# Altium PCB TPS5450.PcbDoc
Units mil, origin at the board's own origin, x right, y up, seen from the top; angles counter-clockwise.
Board outline 740.03 x 410.03 mil, 2 copper layers (Top Layer, Bottom Layer); 8 components, 6 nets, 19 pads, 0 vias.
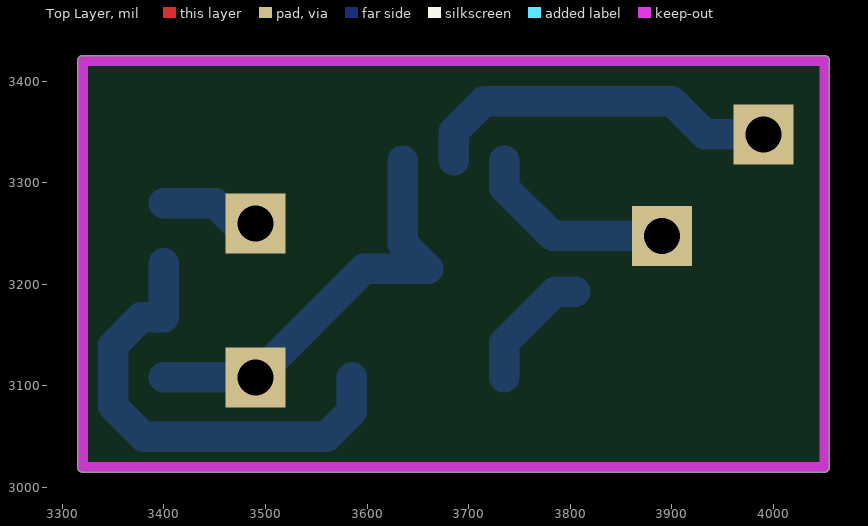
[diagram p0: Top Layer view]
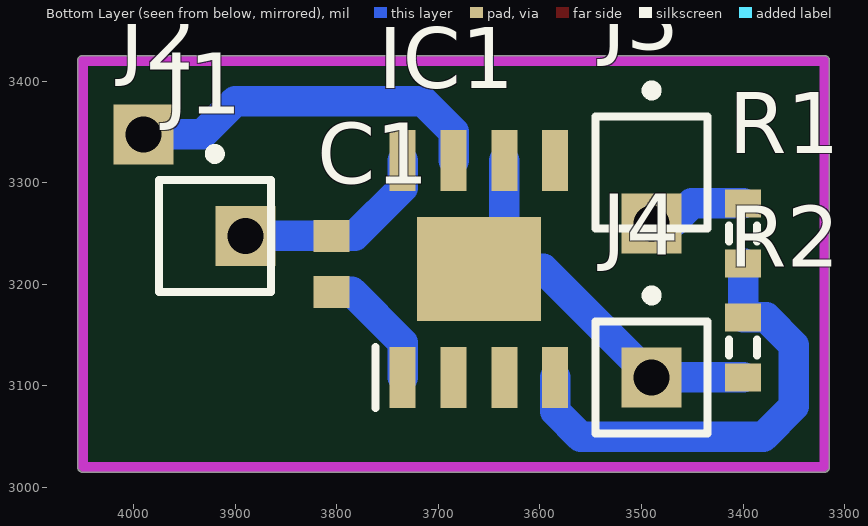
[diagram p1: Bottom Layer view, seen from below]

## Layer stack, top to bottom
Top Solder: solder mask 0.4, Solder Resist, Dk 3.5
Top Layer: signal copper 1.4
Dielectric 1: dielectric 12.6, FR-4, Dk 4.8
Bottom Layer: signal copper 1.4
Bottom Solder: solder mask 0.4, Solder Resist, Dk 3.5

## Board outline
4055.01,3020 cw(c4050,3020) 4050,3014.99 3320,3014.99 cw(c3320,3020) 3314.99,3020 3314.99,3420 cw(c3320,3420) 3320,3425.01 4050,3425.01 cw(c4050,3420) 4055.01,3420

## Design rules (kind name [scope] priority, off if disabled: settings)
Clearance [All] p1: gap=10 ignorepadtopadclearanceinfootprint=FALSE except(0: Arc-Hole Track-Hole SMDPad-Hole THPad-Hole Via-Hole Fill-Hole Poly-Hole Region-Hole Text-Hole)
PolygonConnect [All] p1: connectstyle=Relief reliefconductorwidth=10 reliefentries=4 polygonreliefangle="90 Angle" airgapwidth=10
RoomDefinition TPS5450 [InComponentClass('TPS5450')] p1: confinementstyle=ConfineIn formatcopy=TRUE lockcomponents=FALSE outline 4050,3020 3320,3020 3320,3420 4050,3420
RoutingLayers [All] p1: top layer_v5=FALSE bottom layer_v5=TRUE
RoutingVias [All] p1: holewidth=28 width=50 viastyle="Through Hole" minholewidth=28 minwidth=50 maxholewidth=28 maxwidth=50
SolderMaskExpansion [All] p1: expansion=4
Width [All] p1: maxlimit=50 minlimit=10 preferedwidth=30 bottomlayer_prefwidth=10 minimp=50.000000 maximp=50.000000 favimp=50.000000
29 further rules are at their usual default settings.

## Components (designator, comment, footprint, x,y, rotation, side; value= is the part's Value field where it differs from the comment)
C1 "Cap Semi" 1608[0603] 3805,3220 r90 bottom value=10nF
IC1 "TPS5450QDDARQ1" SOIC127P600X170-9N 3660,3215 r90 bottom
J1 "Socket" PIN1#1 3920,3247.56 r180 bottom
J2 "Socket" PIN1#2 3920,3247.56 r180 bottom
J3 "Socket" PIN1#3 3490,3310 r180 bottom
J4 "Socket" PIN1#4 3490,3108.23 r180 bottom
R1 "Res3" J1-0603 3400,3250 r90 bottom value=10K
R2 "Res3" J1-0603 3400,3137.76 r270 bottom value=3.24K

## Footprints (in the part's own frame and the unit in brackets; to place one, negate y for a bottom-side part, rotate by r counter-clockwise, add the part's x,y. Pads: shape width x height; smd on the part's side, far side on the other; paste and mask are expansions set on the pad)
1608[0603] [mm] "Chip Capacitor, Body 1.6x0.8mm, IPC High Density"
  rect 0.8x0.9 smd: 1(-0.7,0) 2(0.7,0)
  body extent -0.87,-0.48 0.87,0.48, height 1.3
J1-0603 [mm] "Chip Resistor, Body 1.6x0.8mm, IPC High Density"
  rect 0.7x0.9 smd: 1(-0.75,0) 2(0.75,0)
  silkscreen extent -0.2,-0.35 0.2,0.35, body extent -0.85,-0.48 0.85,0.48, height 0.9
PIN1#1 [mm] "Connector; Plug"
  rect 1.5x1.5 hole 0.9: 1(0.762,0)
  silkscreen extent -1.4,-1.4 1.4,2.17
PIN1#2 [mm] "Connector; Plug"
  rect 1.5x1.5 hole 0.9: 1(-1.778,2.54)
  silkscreen extent -1.4,-1.4 1.4,2.17
PIN1#3 [mm] "Connector; Plug"
  rect 1.5x1.5 hole 0.9: 1(0,-1.27)
  silkscreen extent -1.4,-1.4 1.4,2.17
PIN1#4 [mm] "Connector; Plug"
  rect 1.5x1.5 hole 0.9: 1(0,0)
  silkscreen extent -1.4,-1.4 1.4,2.17
SOIC127P600X170-9N [mm]
  rect 1.525x0.65 smd: 1(-2.712,1.905) 2(-2.712,0.635) 3(-2.712,-0.635) 4(-2.712,-1.905) 5(2.712,-1.905) 6(2.712,-0.635) 7(2.712,0.635) 8(2.712,1.905)
  rect 2.6x3.1 smd: 9(0,0)
  silkscreen extent -3.47,2.58 -1.95,2.58, body extent -3,-2.45 3,2.45, height 1.7

## Part data
C1: "Capacitor (Semiconductor SIM Model)", LatestRevisionDate=29-May-2009, LatestRevisionNote="IPC-7351 Footprint Added.", PackageDescription="Chip Capacitor", PackageReference=C1206, Published=8-Jun-2000, Publisher="Altium Limited"
IC1: "Integrated Circuit", Manufacturer_Name="Texas Instruments", Mouser Part Number=595-TPS5450QDDARQ1, Datasheet Link=http://www.ti.com/lit/gpn/tps5450-q1, Height=1.7mm, Manufacturer_Part_Number=TPS5450QDDARQ1, Mouser Price/Stock=https://www.mouser.com/Search/Refine.aspx?Keyword=595-TPS5450QDDARQ1
R1 R2: "Resistor", LatestRevisionDate=29-May-2009, LatestRevisionNote="IPC-7351 Footprint Added.", PackageDescription="Chip Resistor", PackageReference=J1-0603, Published=8-Jun-2000, Publisher="Altium Limited"
J1 J2 J3 J4: LatestRevisionDate=17-Jul-2002, LatestRevisionNote="Re-released for DXP Platform.", Publisher="Altium Limited"

## Nets (pads, with @x,y where several pads share a name; then routed paths per layer and width w, separated by ;. In a path a pad name is that pad's centre, name@x,y a point inside that pad or via, vN(x,y) a via of type N, cw(c..) or ccw(c..) an arc to the next point about the centre after c; other vN are vias at no path point)
GND: IC1.6 IC1.9 J4.1 R2.2 | length 421.4
  Bottom Layer w30: R2.2 J4.1 3596.77,3215 IC1.9 3635,3240 IC1.6
NetC1_1: C1.1 IC1.1 | length 124.9
  Bottom Layer w30: IC1.1 3735,3142.44 3785,3192.44 C1.1
NetIC1_4: IC1.4 R1.1 R2.1 | length 465.5
  Bottom Layer w30: R1.1 R2.1 3377.28,3167.28 3350,3140 3350,3080 3380,3050 3560,3050 3585,3075 IC1.4
NetIC1_7: IC1.7 J2.1 | length 359.1
  Bottom Layer w30: IC1.7 3685,3350 3715,3380 3900,3380 3932.44,3347.56 J2.1
PH: C1.2 IC1.8 J1.1 | length 201.4
  Bottom Layer w30: IC1.8 3735,3295 3782.44,3247.56 C1.2 J1.1
VOUT: J3.1 R1.2 | length 98.1
  Bottom Layer w30: R1.2 3450.47,3279.53 3470,3260 J3.1
pads on no net: IC1.2 IC1.3 IC1.5

## Keep-outs
Keep-Out Layer:
  lines w10: 3320,3020 3320,3420 4050,3420 4050,3020 3320,3020